# EAGLE board circuit (EAGLE 9.7.0)

Size 372.59 x 302.74 mm. Coordinates in mm from the lower left corner, seen from the top.
Outline: 0,0 372.59,0 372.59,302.74 0,302.74 0,0
Copper layers (1*16): Top 0.035mm / dielectric 1.5mm / Bottom 0.035mm
Design rules "default": minimum track width 6mil, minimum drill 0.35mm, track to track 6mil, track to pad 6mil, pad to pad 6mil, via to via 6mil, smd to smd 6mil, copper to edge 40mil, drill to drill 6mil, minimum pad ring 10mil, minimum via ring 8mil, stop-mask expansion 4mil, vias tented up to drill 0mil, thermal gap 10mil

## Footprints (pad centres in the part's own frame; a part is rotated, then mirrored left to right if it is on the bottom)
BATTERY-GENERIC = drill 1.118 pad 3.15 octagon: + 2.54,0; - -2.54,0
LEDRD254W60D565H860B = drill 0.981 pad 1.581: 1 -1.27,0; 2 1.27,0
LEDRD254W60D565H860B_W = drill 0.981 pad 1.581: 1 -1.27,0; 2 1.27,0
HC-SR04 = drill 1.016 long: 1 -3.81,0; 2 -1.27,0; 3 1.27,0; 4 3.81,0
DG01D = drill 1.118 pad 3.15 octagon: + 2.54,0; - -2.54,0
RESAD1016W63L850D250B = drill 0.83 pad 1.43: 1 -5.08,0; 2 5.08,0
HA-06-SM065 = drill 1 pad 1.676: 1 -2.54,-2.54; 2 0,2.54; 3 2.54,-2.54
SG90 = drill 1.016 long: 1 -2.54,0; 2 0,0; 3 2.54,0
ARDUINO-UNO-R3-SHIELD = drill 1.016 pad 1.88: 3.3V 24.13,-2.54; 5V 24.13,0; A0 24.13,12.7; A1 24.13,15.24; A2 24.13,17.78; A3 24.13,20.32; A4 24.13,22.86; A5 24.13,25.4; AREF -24.13,-13.97; D2 -24.13,20.32; D3 -24.13,17.78; D4 -24.13,15.24; D5 -24.13,12.7; D6 -24.13,10.16; D7 -24.13,7.62; D8 -24.13,3.81; D9 -24.13,1.27; D10 -24.13,-1.27; D11 -24.13,-3.81; D12 -24.13,-6.35; D13 -24.13,-8.89; GND@0 24.13,2.54; GND@1 24.13,5.08; GND@2 -24.13,-11.43; IOREF 24.13,-7.62; NC 24.13,-10.16; RES 24.13,-5.08; RX -24.13,25.4; SCL -24.13,-19.05; SDA -24.13,-16.51; TX -24.13,22.86; VIN 24.13,7.62
DIP762W53P254L1969H508Q16B = drill 0.743 pad 1.343: 1 -3.81,8.89; 2 -3.81,6.35; 3 -3.81,3.81; 4 -3.81,1.27; 5 -3.81,-1.27; 6 -3.81,-3.81; 7 -3.81,-6.35; 8 -3.81,-8.89; 9 3.81,-8.89; 10 3.81,-6.35; 11 3.81,-3.81; 12 3.81,-1.27; 13 3.81,1.27; 14 3.81,3.81; 15 3.81,6.35; 16 3.81,8.89

## Placement (x,y rotation side)
BAT3  9V  [BATTERY-GENERIC]  168.79,8.26 180 top
D1  RED  [LEDRD254W60D565H860B]  77.27,128.41 180 top
D2  RED  [LEDRD254W60D565H860B]  7.6,129.13 180 top
D3  WHITE  [LEDRD254W60D565H860B_W]  35.54,129.13 180 top
D4  WHITE  [LEDRD254W60D565H860B_W]  100.13,128.41 180 top
D5  RED  [LEDRD254W60D565H860B]  48.47,239.94 180 top
D6  RED  [LEDRD254W60D565H860B]  66.25,239.94 180 top
D7  WHITE  [LEDRD254W60D565H860B_W]  53.55,237.4 180 top
D8  WHITE  [LEDRD254W60D565H860B_W]  61.17,237.4 180 top
DIST1  DISTANCE-SENSOR-4PINHC-SR04  [HC-SR04]  346.56,254.74 0 top
M1  MOTOR_DG01D  [DG01D]  292.59,37.84 180 top
M4  MOTOR_DG01D  [DG01D]  61.08,39.12 180 top
R1  220  [RESAD1016W63L850D250B]  34.27,144.37 90 top
R2  220  [RESAD1016W63L850D250B]  6.33,144.37 90 top
RPOT1  250k  [HA-06-SM065]  213.28,295.69 0 top
RPOT2  250k  [HA-06-SM065]  193.76,97.61 0 top
SERVO1  SERVOSG90  [SG90]  221.24,269.62 270 top
U1  ARDUINO-UNO-R3-SHIELD  [ARDUINO-UNO-R3-SHIELD]  186.84,162.79 180 top
U2  L293E  [DIP762W53P254L1969H508Q16B]  189.44,51.93 90 top

## Library data of the parts
BAT3 DIST1 M1 M4 R1 R2 RPOT1 RPOT2 SERVO1 U1 U2 = Tinkercad
D1 D2 D5 D6 = Tinkercad; CATEGORY: Opto-Electronic; SUB-CATEGORY: LED; VALUE: LED_RED
D3 D4 D7 D8 = Tinkercad; CATEGORY: Opto-Electronic; SUB-CATEGORY: LED; VALUE: LED_WHITE

## Nets
BAT3+: BAT3.+ U2.16
BAT3-: BAT3.- DIST1.4 R1.2 R2.2 RPOT1.1 RPOT2.1 SERVO1.1 U1.GND@0 U1.GND@1 U1.GND@2 U2.4 U2.5 U2.12 U2.13
D1_C: D1.2 D2.1
D2_C: D2.2 R2.1
D3_C: D3.2 R1.1
D4_C: D3.1 D4.2
D6_C: D6.2 D8.1
D7_C: D5.1 D7.2
D8_C: D7.1 D8.2
M1_+: M1.+ U2.11
M1_-: M1.- U2.14
M4_+: M4.+ U2.3
M4_-: M4.- U2.6
U1_5V: DIST1.1 RPOT1.3 RPOT2.3 SERVO1.2 U1.5V U2.8
U1_A0: DIST1.3 U1.A0
U1_A1: RPOT2.2 U1.A1
U1_A2: RPOT1.2 U1.A2
U1_D2: U1.D2 U2.2
U1_D3: U1.D3 U2.1
U1_D4: U1.D4 U2.7
U1_D5: SERVO1.3 U1.D5
U1_D6: U1.D6 U2.9
U1_D7: U1.D7 U2.10
U1_D8: U1.D8 U2.15
U1_D10: DIST1.2 U1.D10
U1_D11: D6.1 U1.D11
U1_D12: D4.1 U1.D12
U1_D13: D1.1 U1.D13

## Tracks (layer width: path | path; a pad name or v marks a point on that pad's centre or on a via)
BAT3+  (1 unrouted)
BAT3-  (13 unrouted)
D1_C  (1 unrouted)
D2_C  (1 unrouted)
D3_C  (1 unrouted)
D4_C  (1 unrouted)
D6_C  (1 unrouted)
D7_C  (1 unrouted)
D8_C  (1 unrouted)
M1_+  (1 unrouted)
M1_-  (1 unrouted)
M4_+  (1 unrouted)
M4_-  (1 unrouted)
U1_5V  (5 unrouted)
U1_A0  (1 unrouted)
U1_A1  (1 unrouted)
U1_A2  (1 unrouted)
U1_D2  (1 unrouted)
U1_D3  (1 unrouted)
U1_D4  (1 unrouted)
U1_D5  (1 unrouted)
U1_D6  (1 unrouted)
U1_D7  (1 unrouted)
U1_D8  (1 unrouted)
U1_D10  (1 unrouted)
U1_D11  (1 unrouted)
U1_D12  (1 unrouted)
U1_D13  (1 unrouted)